# Altium PCB electro1.PcbDoc
Units mm, origin at the board's own origin, x right, y up, seen from the top; angles counter-clockwise.
Board outline 99.95 x 50.04 mm, 2 copper layers (Top Layer, Bottom Layer); 19 components, 17 nets, 48 pads, 1 vias.
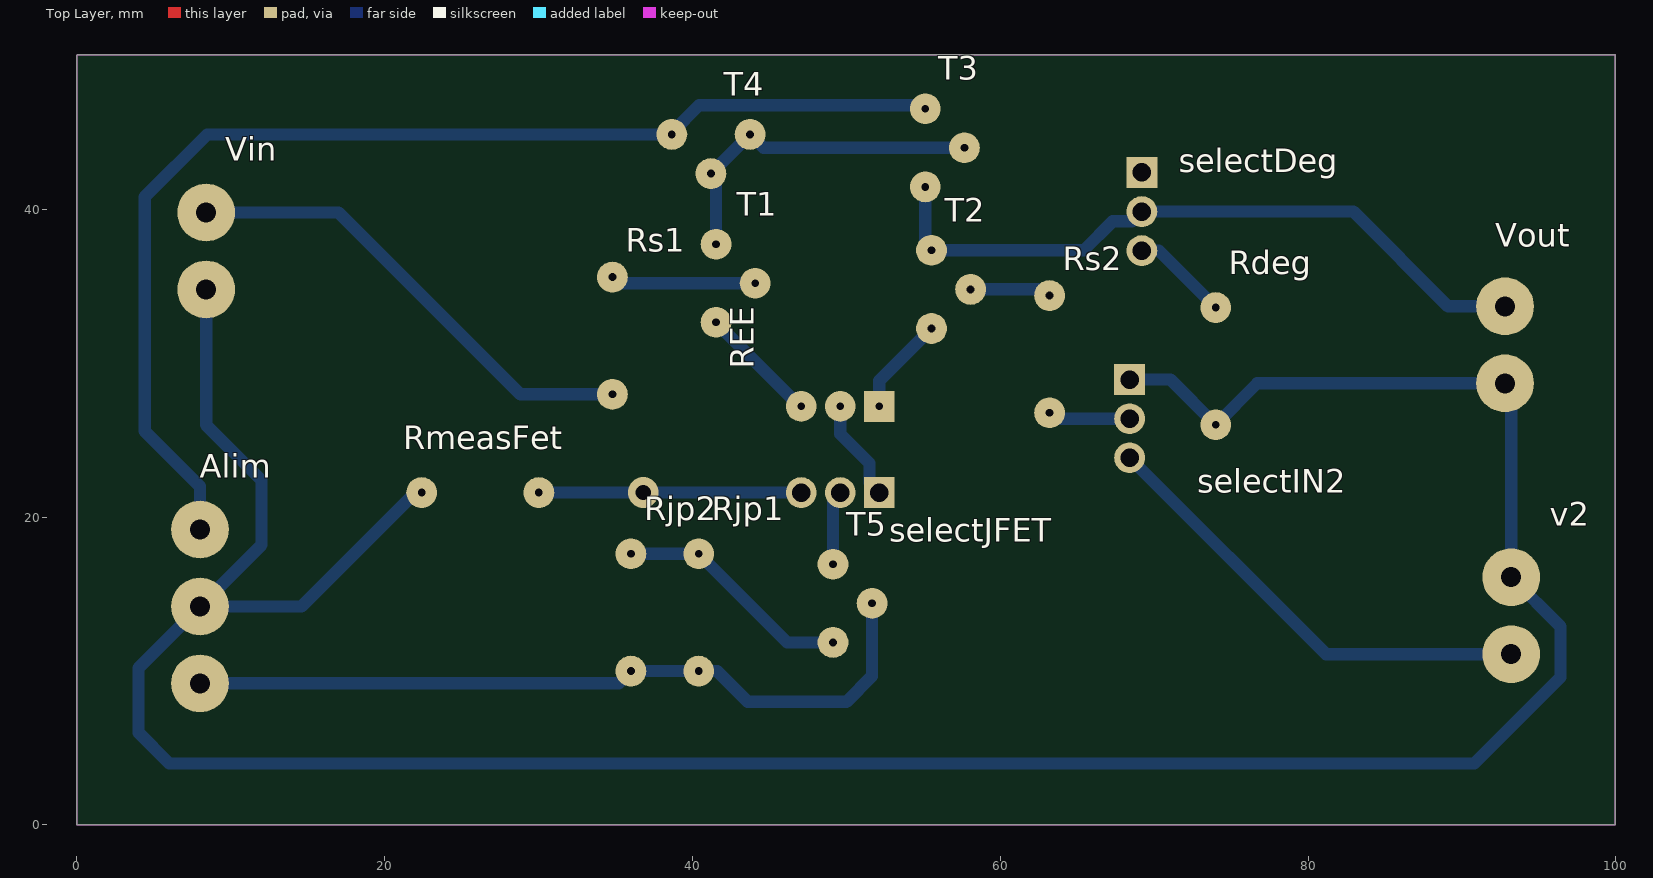
[diagram p0: Top Layer view]
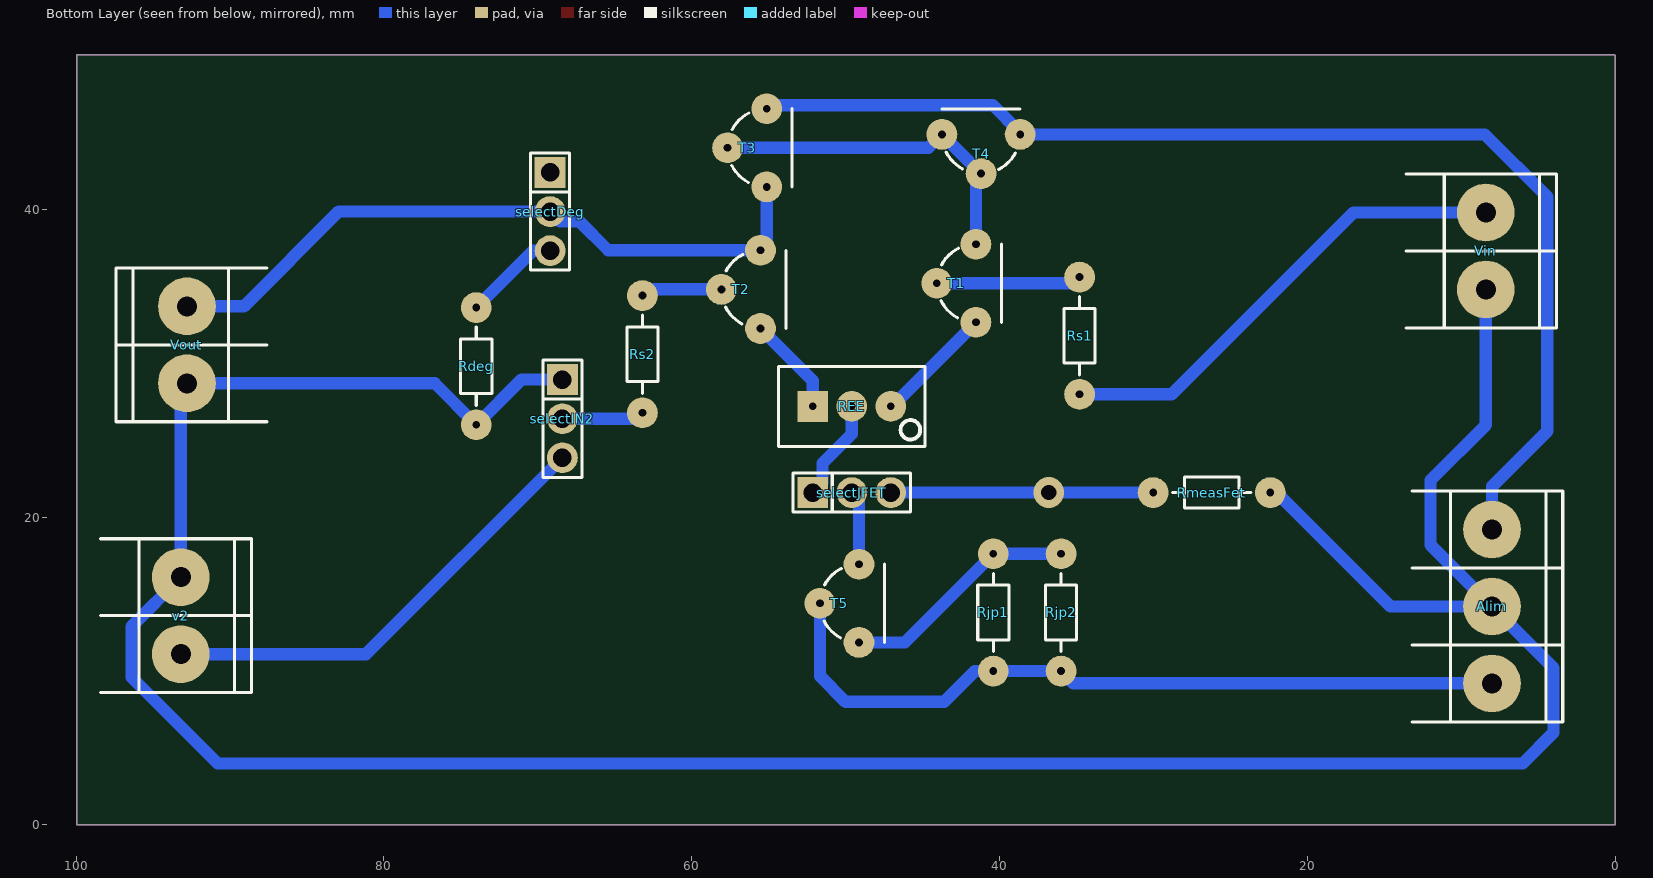
[diagram p1: Bottom Layer view, seen from below]
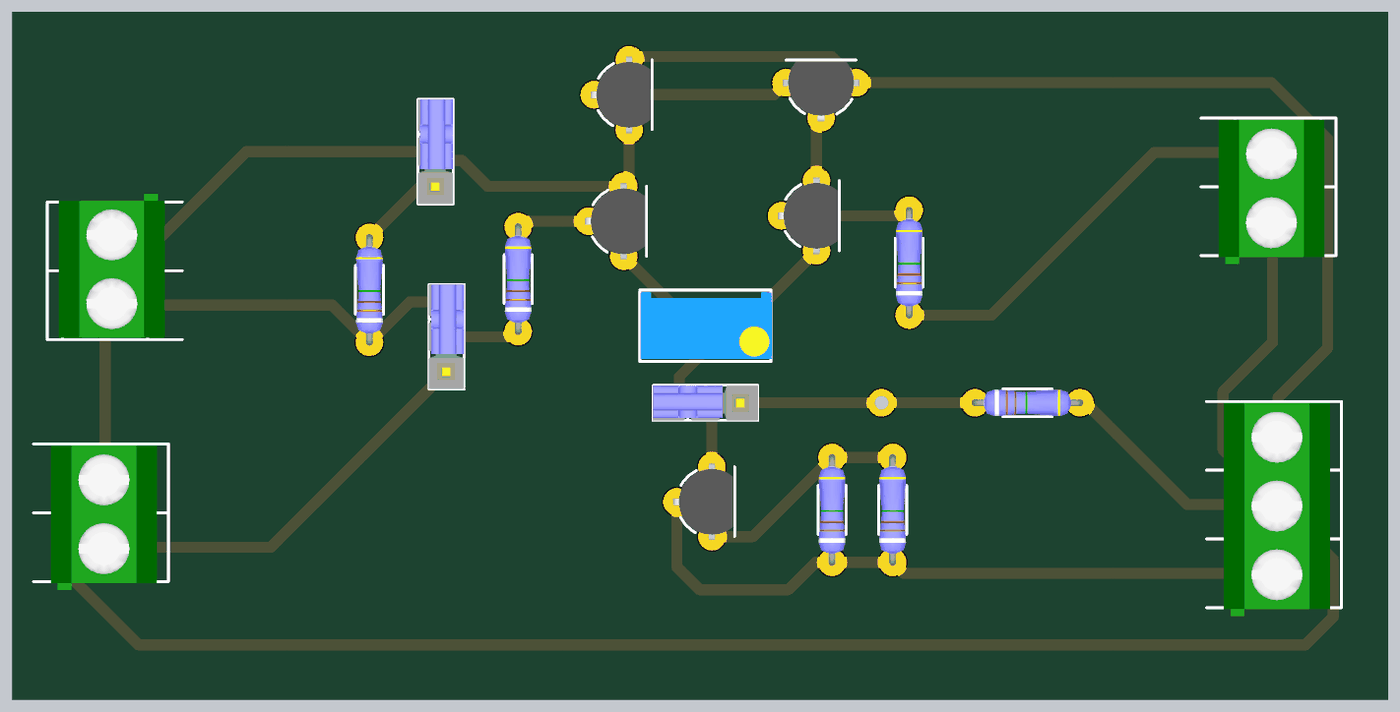
[diagram p2: 3D render of the assembled board from below, using the file's embedded part models]

## Layer stack, top to bottom
Top Solder: solder mask 0.0102, Solder Resist, Dk 3.5
Top Layer: signal copper 0.0356
Dielectric 1: dielectric 0.32, FR-4, Dk 4.8
Bottom Layer: signal copper 0.0356
Bottom Solder: solder mask 0.0102, Solder Resist, Dk 3.5

## Board outline
0,50 0.038,50.038 99.949,50.038 99.949,0 0,0

## Design rules (kind name [scope] priority, off if disabled: settings)
Clearance [All] p1: gap=0.5 ignorepadtopadclearanceinfootprint=FALSE
PolygonConnect [All] p1: connectstyle=Relief reliefconductorwidth=0.254 reliefentries=4 polygonreliefangle="90 Angle" airgapwidth=0.254
RoutingVias [All] p1: holewidth=0.5 width=2 viastyle="Through Hole" minholewidth=0.35 minwidth=1.8 maxholewidth=0.5 maxwidth=2.1
SolderMaskExpansion [All] p1: expansion=0.102
Width [All] p1: maxlimit=0.9 minlimit=0.75 preferedwidth=0.8
30 further rules are at their usual default settings.

## Components (designator, comment, footprint, x,y, rotation, side; value= is the part's Value field where it differs from the comment)
Alim "BORNERA 3" BORNERA3 8,14.2 r0 bottom
Rdeg "RES" RES300 74,26 r90 bottom
REE "PRESET" "PRESET V" 49.6,27.2 r180 bottom
Rjp1 "RES" RES300 40.4,10 r90 bottom
Rjp2 "RES" RES300 36,10 r90 bottom
RmeasFet "RES" RES300 30.02,21.6 r180 bottom
Rs1 "RES" RES300 34.8,27.98 r90 bottom
Rs2 "RES" RES300 63.2,26.78 r90 bottom
selectDeg "JUMPER" JUMPER3 69.2,39.86 r270 bottom
selectIN2 "JUMPER" JUMPER3 68.4,26.4 r270 bottom
selectJFET "JUMPER" JUMPER3 49.6,21.6 r180 bottom
T1 "2N2222" TO92 42.8,35.2 r270 bottom
T2 "2N2222" TO92 56.8,34.8 r270 bottom
T3 "2N2222" TO92 56.4,44 r270 bottom
T4 "2N2222" TO92 41.2,43.6 r180 bottom
T5 "2N2222" TO92 50.4,14.4 r270 bottom
v2 "BORNERA 2" BORNERA2 93.2,13.6 r0 bottom
Vin "BORNERA 2" BORNERA2 8.4,37.3 r0 bottom
Vout "BORNERA 2" BORNERA2 92.8,31.2 r180 bottom

## Footprints (in the part's own frame and the unit in brackets; to place one, negate y for a bottom-side part, rotate by r counter-clockwise, add the part's x,y. Pads: shape width x height; smd on the part's side, far side on the other; paste and mask are expansions set on the pad)
BORNERA2 [mm] "Bornera con Tornillos 5mm separación"
  round 3.75 hole 1.3: 1(0,2.5) 2(0,-2.5)
  silkscreen extent -4.6,-5 5.2,5, body extent -3.76,-4.89 3.94,5.61, height 10
BORNERA3 [mm] "Bornera con Tornillos 5mm separación"
  round 3.75 hole 1.3: 1(0,5) 2(0,0) 3(0,-5)
  silkscreen extent -4.6,-7.5 5.2,7.5, body extent -3.76,-7.39 3.94,8.11, height 10.05
JUMPER3 [mm]
  rect 2x2 hole 1.2: 1(-2.54,0)
  round 2 hole 1.2: 2(0,0) 3(2.54,0)
  silkscreen extent -3.81,-1.27 3.81,1.27, body extent -3.81,-1.3 3.81,1.27, height 16.15
"PRESET V" [mm]
  rect 2x2 hole 0.5: 1(-2.54,0)
  round 2 hole 0.5: 2(0,0) 3(2.54,0)
  silkscreen extent -4.76,-2.6 4.76,2.6, body extent -4.7,-2.42 4.83,2.42, height 11.55
RES300 [mm]
  round 2 hole 0.5: 1(0,0) 2(7.62,0)
  silkscreen extent 1.27,-1.02 6.35,1.02, body extent -0.25,-0.97 7.87,0.97, height 2.01
TO92 [mm]
  round 2 hole 0.5: 1(0,-1.27) 2(2.54,1.27) 3(-2.54,1.27)
  silkscreen extent -2.54,-1 2.54,2.92, body extent -2.79,-1.55 2.79,2.79, height 8

## Part data
selectDeg selectIN2 selectJFET: library part JUMPER3

## Via types
v1: diameter 2, hole 1, Top Layer to Bottom Layer, 1 vias

## Nets (pads, with @x,y where several pads share a name; then routed paths per layer and width w, separated by ;. In a path a pad name is that pad's centre, name@x,y a point inside that pad or via, vN(x,y) a via of type N, cw(c..) or ccw(c..) an arc to the next point about the centre after c; other vN are vias at no path point)
+VCC: Alim.3 T3.3 T4.2 | length 76.6
  Bottom Layer w0.8: Alim.3 8,22 4.4,25.6 4.4,40.8 8.47,44.87 T4.2 38.66,45 40.43,46.77 55.13,46.77 T3.3
-VEE: Alim.1 Rjp1.1 Rjp2.1 T5.1 | length 50.3
  Bottom Layer w0.8: Alim.1 35.2,9.2 Rjp2.1 Rjp1.1 41.6,10 43.6,8 50,8 51.67,9.67 T5.1
GND: Alim.2 Rdeg.1 RmeasFet.2 selectIN2.1 v2.2 Vin.1 Vout.2 | length 193.9
  Bottom Layer w0.8: Vin.1 8.4,26 12,22.4 12,18.2 Alim.2 ; RmeasFet.2 22,21.6 14.6,14.2 Alim.2 ; selectIN2.1 71.06,28.94 Rdeg.1 76.7,28.7 Vout.2 93.2,28.3 v2.2 96.4,12.9 96.4,9.6 90.8,4 6,4 4,6 4,10.2 Alim.2
NetRdeg_2: Rdeg.2 selectDeg.3 | length 6.3
  Bottom Layer w0.8: selectDeg.3 70.3,37.32 Rdeg.2
NetREE_1: REE.1 T2.2 | length 6.5
  Bottom Layer w0.8: REE.1 52.14,28.87 T2.2
NetREE_2: REE.2 selectJFET.1 | length 6.7
  Bottom Layer w0.8: REE.2 49.6,25.4 51.5,23.5 51.5,22.24 selectJFET.1
NetREE_3: REE.3 T1.2 | length 7.8
  Bottom Layer w0.8: T1.2 46.99,27.2 REE.3
NetRjp1_2: Rjp1.2 Rjp2.2 T5.2 | length 15.5
  Bottom Layer w0.8: Rjp2.2 Rjp1.2 46.16,11.86 T5.2
NetRmeasFet_1: RmeasFet.1 selectJFET.3 | length 17
  Bottom Layer w0.8: RmeasFet.1 v1(36.8,21.6) selectJFET.3
NetRs1_1: Rs1.1 Vin.2 | length 31.3
  Bottom Layer w0.8: Vin.2 17,39.8 28.82,27.98 Rs1.1
NetRs1_2: Rs1.2 T1.1 | length 9.4
  Bottom Layer w0.8: Rs1.2 35.2,35.2 T1.1
NetRs2_1: Rs2.1 selectIN2.2 | length 5.4
  Bottom Layer w0.8: Rs2.1 63.58,26.4 selectIN2.2
NetRs2_2: Rs2.2 T2.1 | length 5.3
  Bottom Layer w0.8: T2.1 62.8,34.8 Rs2.2
NetselectDeg_2: selectDeg.2 T2.3 T3.2 Vout.1 | length 45.2
  Bottom Layer w0.8: T3.2 55.13,37.74 T2.3 65.42,37.34 67.3,39.22 68.56,39.22 selectDeg.2 82.94,39.86 89.1,33.7 Vout.1
NetselectJFET_2: selectJFET.2 T5.3 | length 4.9
  Bottom Layer w0.8: T5.3 49.13,21.13 selectJFET.2
NetT1_3: T1.3 T3.1 T4.1 T4.3 | length 22.6
  Bottom Layer w0.8: T1.3 41.53,42 T4.1 T4.3 44.61,44 T3.1
v2: selectIN2.3 v2.1 | length 30.1
  Bottom Layer w0.8: selectIN2.3 81.16,11.1 v2.1
pads on no net: selectDeg.1

## Keep-outs
Keep-Out Layer:
  the board outline again, w0.1